# EAGLE board routev7.1 (EAGLE 8.6.0)
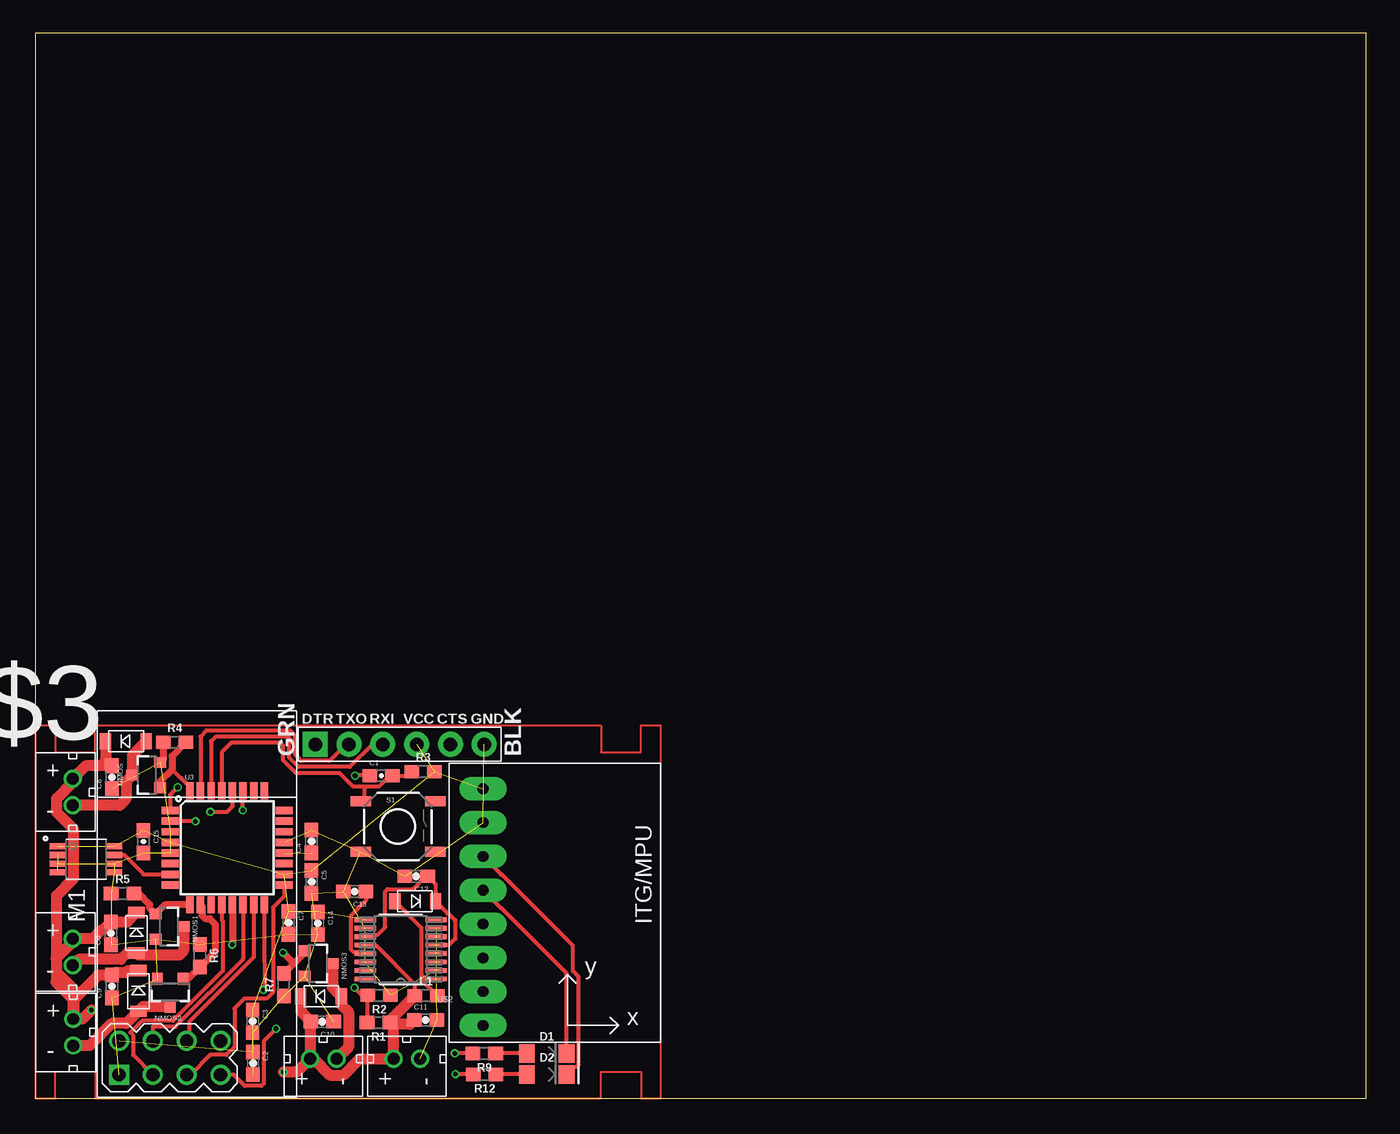
[diagram p0: board, top side]
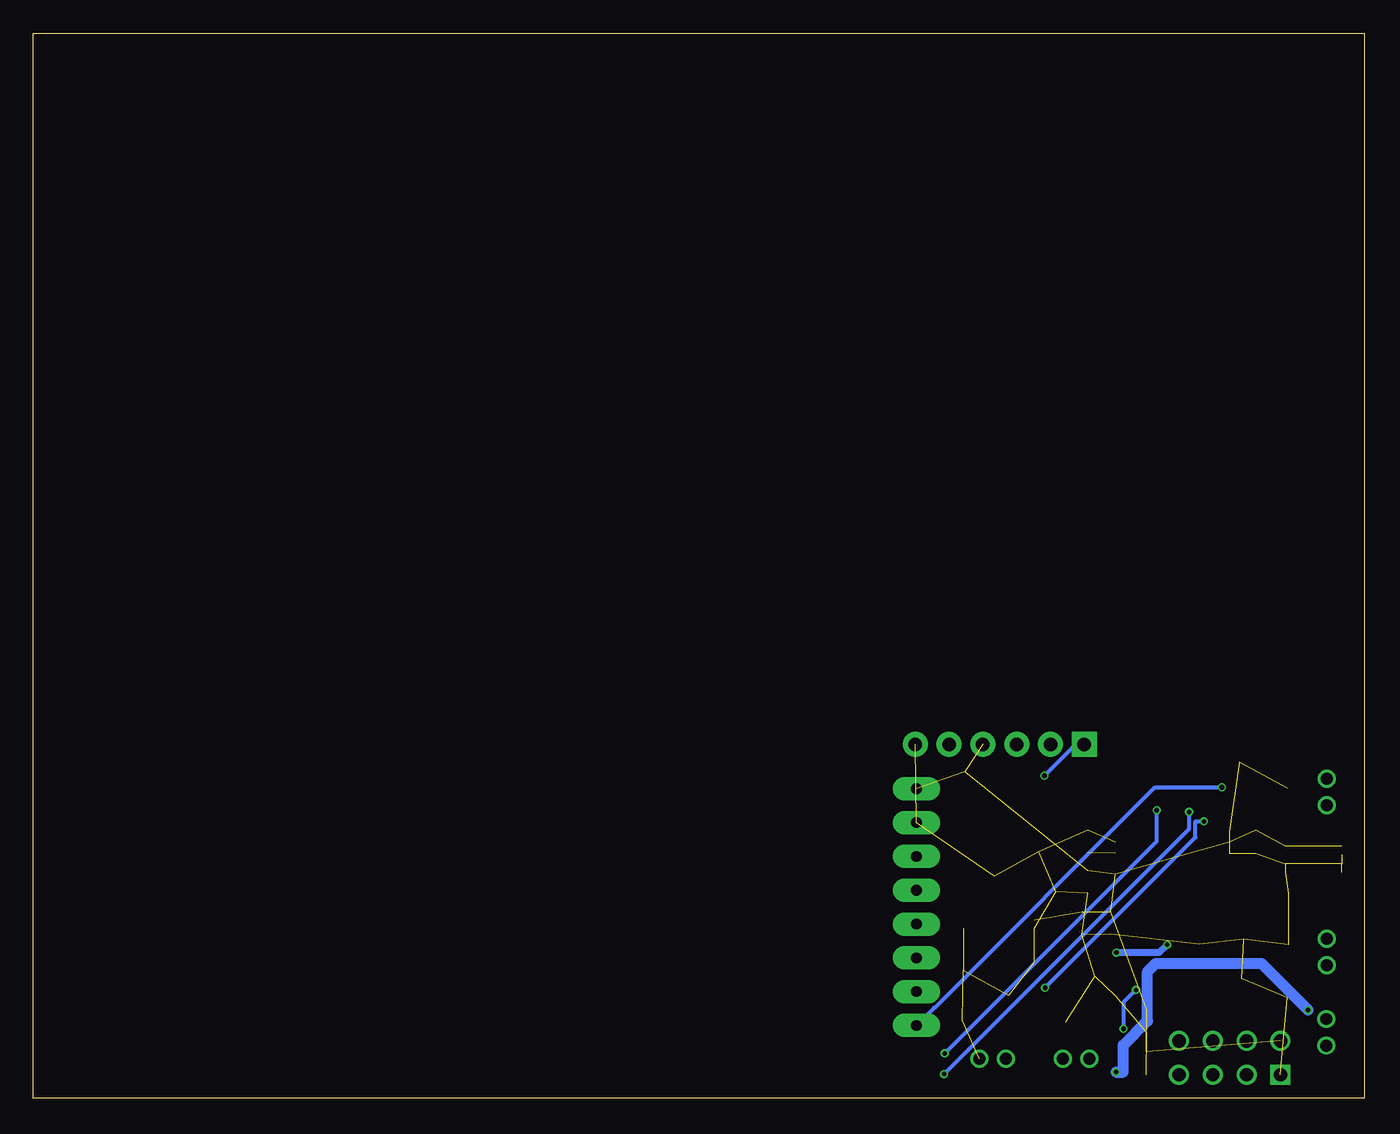
[diagram p1: board, bottom side, seen from below]

Size 100 x 80 mm. Coordinates in mm from the lower left corner, seen from the top.
Outline: 0,0 100,0 100,80 0,80 0,0
Copper layers (1*16): Top 0.035559375mm / dielectric 1.6mm / Bottom 0.035559375mm
Design rules "oshpark-2layer": minimum track width 6mil, minimum drill 10mil, track to track 6mil, track to pad 6mil, pad to pad 6mil, via to via 6mil, smd to smd 6mil, copper to edge 15mil, drill to drill 6mil, minimum pad ring 5mil, minimum via ring 5mil, stop-mask expansion 2.5mil, vias tented up to drill 0mil, thermal gap 10mil

## Footprints (pad centres in the part's own frame; a part is rotated, then mirrored left to right if it is on the bottom)
0603-CAP = smd 1.1 x 1: 1 -0.85,0; 2 0.85,0
LED-1206 = smd 1.2 x 1.4: A -1.5,0; C 1.5,0
MINI2-F3-B = smd 1.22 x 0.85: NEG 0,1.55; POS 0,-1.5
FTDI_DEVICE_SIDE = drill 1.016 pad 1.88 square: P$1 -6.35,0 | drill 1.016 pad 1.88: P$2 -3.81,0; P$3 -1.27,0; P$4 1.27,0; P$5 3.81,0; P$6 6.35,0
0603 = smd 1.1 x 1: 1 -0.85,0; 2 0.85,0
WIRELESS-NRF24L01 = drill 1 square: 1 -12.7,6.35 | drill 1: 2 -10.16,6.35; 3 -12.7,3.81; 4 -10.16,3.81; 5 -12.7,1.27; 6 -10.16,1.27; 7 -12.7,-1.27; 8 -10.16,-1.27
JST_CONNECTOR_FEMALE = drill 0.889: + 0,1; - 0,-1
SOT23-3 = smd 0.8 x 0.9: 1 -0.95,-1; 2 0.95,-1; 3 0,1.1
TACTILE-SWITCH-SMD = smd 1.524 x 0.762: 1 -2.794,1.905; 2 2.794,1.905; 3 -2.794,-1.905; 4 2.794,-1.905
GY-521 = drill 0.8 pad 1.778 long: ADO -8.89,-6.35; GND -8.89,6.35; INT -8.89,-8.89; SCL -8.89,3.81; SDA -8.89,1.27; VCC -8.89,8.89; XCL -8.89,-3.81; XDA -8.89,-1.27
TQFP32-08 = smd 1.27 x 0.559: 1 -4.293,2.8; 2 -4.293,2; 3 -4.293,1.2; 4 -4.293,0.4; 5 -4.293,-0.4; 6 -4.293,-1.2; 7 -4.293,-2; 8 -4.293,-2.8; 17 4.293,-2.8; 18 4.293,-2; 19 4.293,-1.2; 20 4.293,-0.4; 21 4.293,0.4; 22 4.293,1.2; 23 4.293,2; 24 4.293,2.8 | smd 0.559 x 1.27: 9 -2.8,-4.293; 10 -2,-4.293; 11 -1.2,-4.293; 12 -0.4,-4.293; 13 0.4,-4.293; 14 1.2,-4.293; 15 2,-4.293; 16 2.8,-4.293; 25 2.8,4.293; 26 2,4.293; 27 1.2,4.293; 28 0.4,4.293; 29 -0.4,4.293; 30 -1.2,4.293; 31 -2,4.293; 32 -2.8,4.293
21-0055H_16 = smd 1.6 x 0.356: 1 -2.654,2.223; 2 -2.654,1.587; 3 -2.654,0.953; 4 -2.654,0.318; 5 -2.654,-0.318; 6 -2.654,-0.953; 7 -2.654,-1.587; 8 -2.654,-2.223; 9 2.654,-2.223; 10 2.654,-1.587; 11 2.654,-0.953; 12 2.654,-0.318; 13 2.654,0.318; 14 2.654,0.953; 15 2.654,1.587; 16 2.654,2.223
SOP65P490X110-8N = smd 1.25 x 0.46: 1 -2.11,0.975; 2 -2.11,0.325; 3 -2.11,-0.325; 4 -2.11,-0.975; 5 2.11,-0.975; 6 2.11,-0.325; 7 2.11,0.325; 8 2.11,0.975

## Placement (x,y rotation side)
C1  100nF  [0603-CAP]  25.98,24.23 0 top
C2  10uF  [0603-CAP]  16.36,2.64 270 top
C3  100nF  [0603-CAP]  16.33,5.79 270 top
C4  100nF  [0603-CAP]  20.75,19.3 90 top
C5  100nF  [0603-CAP]  20.75,16.26 270 top
C6  100uF  [0603-CAP]  5.69,12.4 90 top
C7  100nF  [0603-CAP]  19.02,13.18 270 top
C8  100uF  [0603-CAP]  5.77,24.13 90 top
C9  100uF  [0603-CAP]  5.77,8.41 90 top
C10  100uF  [0603-CAP]  21.56,5.77 180 top
C11  100uF  [0603-CAP]  29.33,5.89 0 top
C12  100uF  [0603-CAP]  28.62,16.68 180 top
C13  0.1uF  [0603-CAP]  24,15.54 180 top
C14  4.7uF  [0603-CAP]  21.23,13.15 270 top
C15  100nF  [0603-CAP]  8.13,19.28 270 top
D1  Yellow  [LED-1206]  38.43,3.38 0 top
D2  Yellow  [LED-1206]  38.43,1.8 0 top
DIODE  DB2W40300L  [MINI2-F3-B]  6.83,26.82 90 top
DIODE1  DB2W40300L  [MINI2-F3-B]  7.59,12.42 0 top
DIODE2  DB2W40300L  [MINI2-F3-B]  7.75,8.05 0 top
DIODE3  DB2W40300L  [MINI2-F3-B]  21.49,7.67 90 top
DIODE4  DB2W40300L  [MINI2-F3-B]  28.52,14.8 270 top
J2  FTDI_DEVICE  [FTDI_DEVICE_SIDE]  27.38,26.59 0 top
L1  10uH  [0603]  29.36,7.72 0 top
M1  WIRELESS-NRF24L01  [WIRELESS-NRF24L01]  12.65,14.48 90 top
MOTOR  JST_CONNECTOR_FEMALE  [JST_CONNECTOR_FEMALE]  2.82,23.01 0 top
MOTOR1  JST_CONNECTOR_FEMALE  [JST_CONNECTOR_FEMALE]  2.82,11 0 top
MOTOR2  JST_CONNECTOR_FEMALE  [JST_CONNECTOR_FEMALE]  2.84,4.97 0 top
MOTOR3  JST_CONNECTOR_FEMALE  [JST_CONNECTOR_FEMALE]  21.64,2.97 90 top
NMOS  N-CHANNEL-MOSFET-IRLML6244TRPBF  [SOT23-3]  8.38,24.28 90 top
NMOS1  N-CHANNEL-MOSFET-IRLML6244TRPBF  [SOT23-3]  10.03,12.9 270 top
NMOS2  N-CHANNEL-MOSFET-IRLML6244TRPBF  [SOT23-3]  10.13,8 180 top
NMOS3  N-CHANNEL-MOSFET-IRLML6244TRPBF  [SOT23-3]  21.23,10.13 270 top
R1  2.2k  [0603]  25.78,5.69 180 top
R2  2.2k  [0603]  25.83,7.75 180 top
R3  10k  [0603]  29.13,24.54 0 top
R4  10k  [0603]  10.46,26.75 0 top
R5  10k  [0603]  6.55,15.39 0 top
R6  10k  [0603]  12.37,10.72 270 top
R7  10k  [0603]  18.67,8.53 90 top
R9  1k  [0603]  33.73,3.38 180 top
R12  1k  [0603]  33.76,1.8 180 top
S1  SWITCH-MOMENTARY-2SMD  [TACTILE-SWITCH-SMD]  27.25,20.42 0 top
U2  GY-521MPU6050  [GY-521]  42.54,14.37 0 top
U3  ATMEGA328P_TQFP  [TQFP32-08]  14.41,18.83 0 top
U$1  JST_CONNECTOR_FEMALE  [JST_CONNECTOR_FEMALE]  27.91,2.97 90 top
U$2  MAX1672'MAX1672'  [21-0055H_16]  27.45,11.2 180 top
U$3  LTC6930CMS8-8.19LTC6930CMS8-8.19  [SOP65P490X110-8N]  3.81,17.96 0 top

## Library data of the parts
C1 C15 = SparkFun-Capacitors; PROD_ID: CAP-00810
C2-C14 = SparkFun-Passives
D1 D2 = SparkFun-LED; PROD_ID: DIO-09909
DIODE DIODE1-DIODE4 J2 M1 MOTOR MOTOR1-MOTOR3 U2 U$1 = quad
L1 = SparkFun-Coils; PROD_ID: NDUC-07874
NMOS NMOS1-NMOS3 = quad; DATASHEET: http://www.mouser.com/ds/2/196/irlml6244pbf-936666.pdf; MOUSER: 942-IRLML6244TRPBF; URL: http://www.mouser.com/Search/ProductDetail.aspx?R=IRLML6244TRPBFvirtualkey57370000virtualkey942-IRLML6244TRPBF
R1-R7 R9 R12 = SparkFun-Resistors; PROD_ID: RES-08272
S1 = quad; PROD_ID: SWCH-08247
U3 = quad; PROD_ID: IC-09069
U$2 = voltreg
U$3 = LTC6390

## Nets
BATTERY+: C6.2 C8.2 C9.2 C10.2 C11.1 DIODE1.NEG DIODE2.NEG DIODE3.NEG DIODE.NEG L1.1 MOTOR1.+ MOTOR2.+ MOTOR3.+ MOTOR.+ R1.1 U$1.+ U$2.12
FTDI-RX: J2.P$3 U3.30
FTDI-TX: J2.P$2 U3.31
GND: C2.2 C3.2 C4.2 C5.2 C6.1 C7.2 C8.1 C9.1 C10.1 C11.2 C12.2 C13.2 C14.2 C15.2 J2.P$6 M1.1 NMOS1.2 NMOS2.2 NMOS3.2 NMOS.2 R2.1 R4.1 R5.1 R6.1 R7.1 S1.3 U2.GND U3.3 U3.5 U3.21 U$1.- U$2.2 U$2.6 U$2.7 U$2.10 U$2.14 U$3.2 U$3.3 U$3.4 U$3.5 U$3.6
IMU-INT: U2.INT U3.1
IMU-SCL: D2.C U2.SCL
IMU-SDA: D1.C U2.SDA
MEASURE_PIN: R1.2 R2.2 U3.2
MOTOR1: NMOS.1 R4.2 U3.32
MOTOR2: NMOS1.1 R5.2 U3.9
MOTOR3: NMOS2.1 R6.2 U3.10
MOTOR4: NMOS3.1 R7.2 U3.13
N$1: DIODE4.POS L1.2 U$2.1
N$2: C4.1 U3.20
N$3: D1.A R9.1
N$4: DIODE1.POS MOTOR1.- NMOS1.3
N$5: DIODE2.POS MOTOR2.- NMOS2.3
N$6: DIODE.POS MOTOR.- NMOS.3
N$7: DIODE3.POS MOTOR3.- NMOS3.3
N$8: R9.2 U3.27
N$9: D2.A R12.1
N$10: R12.2 U3.28
N$12: C1.1 J2.P$1
OSC1: U3.7 U$3.7
RESET: C1.2 R3.1 S1.1 U3.29
RF-CE: M1.3 U3.12
RF-CSN: M1.4 U3.14
RF-MISO: M1.7 U3.16
RF-MOSI: M1.6 U3.15
RF-SCK: M1.5 U3.17
VCC: C2.1 C3.1 C5.1 C7.1 C14.1 C15.1 J2.P$4 M1.2 R3.2 U2.VCC U3.4 U3.18 U$2.9 U$3.1 U$3.8
VR-PS: C12.1 DIODE4.NEG U$2.5 U$2.11
VR-REF: C13.1 U$2.13

## Tracks (layer width: path | path; a pad name or v marks a point on that pad's centre or on a via)
BATTERY+  (via drill 0.35)
  Top 0.305: U$2.12 24.82,11.49 25.6,11.49 28.51,8.58 L1.1
  Top 0.813: DIODE1.NEG 6.87,13.24 C6.2 5.1,12.65 4.96,12.65 4.3,12 MOTOR1.+ 2.82,11.78 1.56,10.52 1.56,8.72 2.87,7.42 | DIODE2.NEG 6.95,9.6 6.82,9.47 5.98,9.47 C9.2 4.71,9.26 2.87,7.42 | 2.87,7.42 2.87,5.99 MOTOR2.+ | DIODE.NEG 5.28,25.46 C8.2 3.79,24.98 MOTOR.+ 2.82,23.75 1.59,22.52 1.59,21.5 2.88,20.21 2.88,16.52 1.59,15.23 1.59,9.49 2.84,8.24 MOTOR2.+ | DIODE3.NEG 19.94,6.54 C10.2 20.64,5.69 MOTOR3.+ | L1.1 26.63,5.84 | 26.63,5.84 R1.1 | 26.91,5.55 U$1.+ 24.37,2.97 23.15,1.75 22.13,1.75 20.91,2.97 MOTOR3.+ | 26.91,5.55 26.63,5.84 | MOTOR3.+ 19.65,1.98 v18.64,1.98 | C11.1 28.15,5.55 26.91,5.55 | v4.22,6.63 3.55,5.97 MOTOR2.+
  Bottom 0.813: v18.64,1.98 18.11,1.98 18.11,3.99 16.28,5.82 16.28,9.53 15.67,10.13 7.72,10.13 v4.22,6.63
FTDI-RX
  Top 0.305: J2.P$3 25.33,26.59 23.63,24.89 19.78,24.89 19.07,25.59 19.07,27.07 18.98,27.16 13.54,27.16 13.21,26.84 U3.30
FTDI-TX
  Top 0.305: J2.P$2 23.34,26.59 22.1,25.35 19.96,25.35 19.79,25.53 19.79,25.55 19.53,25.81 19.53,27.25 19.17,27.62 12.85,27.62 12.41,27.18 U3.31
GND  (39 unrouted)
  Top 0.508: R4.1 9.62,25.46 NMOS.2
IMU-INT  (via drill 0.35)
  Top 0.305: v10.69,23.37 10.14,22.81 10.12,22.79 U3.1
  Bottom 0.305: U2.INT 32.3,6.83 32.27,6.83 15.72,23.37 v10.69,23.37
IMU-SCL
  Top 0.305: U2.SCL 34.99,16.83 35.03,16.83 40.39,11.48 40.39,9.58 40.84,9.14 40.84,2.55 40.66,2.37 40.5,2.37 D2.C
IMU-SDA
  Top 0.305: U2.SDA 34.99,14.29 35.03,14.29 39.93,9.39 D1.C
MEASURE_PIN  (via drill 0.35)
  Top 0.305: v23.98,8.31 24.54,7.75 R2.2 24.93,7.7 R1.2 | v12.04,20.8 12.01,20.83 U3.2
  Bottom 0.305: v23.98,8.31 12.68,19.61 12.68,20.8 v12.04,20.8
MOTOR1
  Top 0.305: 10.28,24.7 10.93,24.05 10.98,24.05 11.61,23.41 U3.32
  Top 0.508: R4.2 10.28,25.71 10.28,24.7 9.38,23.81 NMOS.1
MOTOR2
  Top 0.508: U3.9 9.72,14.54 NMOS1.1 8.61,14.28 8.61,14.56 7.78,15.39 R5.2
MOTOR3
  Top 0.508: U3.10 12.53,14.42 12.53,13.73 12.77,13.49 13.11,13.49 13.53,13.07 13.53,11.03 R6.2 11.5,9 NMOS2.1
MOTOR4  (via drill 0.35)
  Top 0.508: R7.2 19.4,10.12 | 19.4,10.12 20.23,10.95 NMOS3.1 | U3.13 v14.81,11.56 | v18.62,10.95 19.4,10.17 19.4,10.12
  Bottom 0.508: v14.81,11.56 15.42,10.95 v18.62,10.95
N$1
  Top 0.305: DIODE4.POS 29,12.82 29,9.3 | 29,9.3 29.33,8.97 U$2.1 | 29,9.3 29,8.92 L1.2
N$2  (1 unrouted)
N$3
  Top 0.305: D1.A R9.1
N$4
  Top 0.813: NMOS1.3 11.13,11.08 10.82,10.77 7.75,10.77 DIODE1.POS 6.91,10.92 6.42,10.44 3.26,10.44 MOTOR1.-
N$5
  Top 0.813: NMOS2.3 8.1,6.9 DIODE2.POS 6.83,5.63 5.75,5.63 4.08,3.97 MOTOR2.-
N$6
  Top 0.813: DIODE.POS 7.28,25.77 NMOS.3 6.83,23.82 6.83,22.5 6.34,22.01 MOTOR.-
N$7
  Top 0.813: NMOS3.3 22.33,8.32 DIODE3.POS 22.99,7.03 23.52,6.5 23.52,3.85 MOTOR3.-
N$8  (via drill 0.35)
  Top 0.305: R9.2 v31.52,3.38 | v15.6,21.64 15.6,23.1 U3.27
  Bottom 0.305: v31.52,3.38 15.6,19.3 v15.6,21.64
N$9
  Top 0.305: D2.A R12.1
N$10  (via drill 0.35)
  Top 0.305: R12.2 32.88,1.83 v31.57,1.83 | v13.16,21.51 14.4,21.51 14.83,21.95 14.81,21.97 U3.28
  Bottom 0.305: v31.57,1.83 13.16,20.24 v13.16,21.51
N$11
  Top 0.152: 1.5,2 1.5,0 0,0 0,28 1.5,28 1.5,26 4.5,26 4.5,28 42.5,28 42.5,26 45.5,26 45.5,28 47,28 47,0 45.5,0 45.5,2 42.5,2 42.5,0 4.5,0 4.5,2
N$12  (via drill 0.35)
  Top 0.305: C1.1 25.08,24.28 24.08,24.28 v24.03,24.23
  Bottom 0.305: v24.03,24.23 21.67,26.59 J2.P$1
OSC1
  Top 0.305: U$3.7 6.68,18.28 8.14,16.83 U3.7
RESET
  Top 0.305: R3.1 27.98,24.23 C1.2 26.61,24.23 25.81,23.43 24.74,23.43 | 24.74,23.43 23.87,23.43 22.86,24.43 19.59,24.43 18.62,25.4 18.62,26.49 18.41,26.7 14.73,26.7 14.01,25.99 U3.29 | S1.1 24.74,22.61 24.74,23.43
RF-CE
  Top 0.305: U3.12 14.01,13.38 14.09,13.31 14.09,9.57 10.34,5.82 8.02,5.82 7.16,4.96 7.36,4.76 7.36,3.26 M1.3
RF-CSN
  Top 0.305: U3.14 15.61,10.45 10.53,5.37 8.84,5.37 M1.4
RF-MISO  (via drill 0.35)
  Top 0.305: U3.16 17.21,12.13 17.22,8.15 v17.14,8.15 | v18.09,5.23 17.16,4.31 17.16,1.11 16.98,0.94 15.73,0.94 14.89,1.78 M1.7
  Bottom 0.305: v17.14,8.15 18.09,7.21 v18.09,5.23
RF-MOSI
  Top 0.305: U3.15 16.41,10.61 11.58,5.77 11.58,4.52 M1.6
RF-SCK
  Top 0.305: U3.17 18.71,15.2 17.86,14.35 17.86,7.98 17.38,7.5 15.71,7.5 14.97,6.76 14.97,3.88 14.35,3.27 13.15,3.27 11.66,1.78 M1.5
VCC  (14 unrouted)
VR-PS
  Top 0.305: U$2.5 31.07,11.51 31.55,11.99 31.55,13.39 31.03,13.9 30.97,13.9 DIODE4.NEG 30.07,16.08 C12.1 29.33,16.68 28.37,15.72 26.47,15.72 26.29,15.54 26.29,12.87 25.73,12.3 24.95,12.3 U$2.11
VR-REF
  Top 0.305: C13.1 24.85,14.88 23.69,13.72 23.69,11.21 23.87,11.03 24.65,11.03 U$2.13